# Altium PCB 2layer.PcbDoc (part 2 of 2)
Units mm, origin at the board's own origin, x right, y up, seen from the top; angles counter-clockwise.
Board outline 95.88 x 80.26 mm, 2 copper layers (Top Layer, Bottom Layer); 72 components, 60 nets, 280 pads, 229 vias.
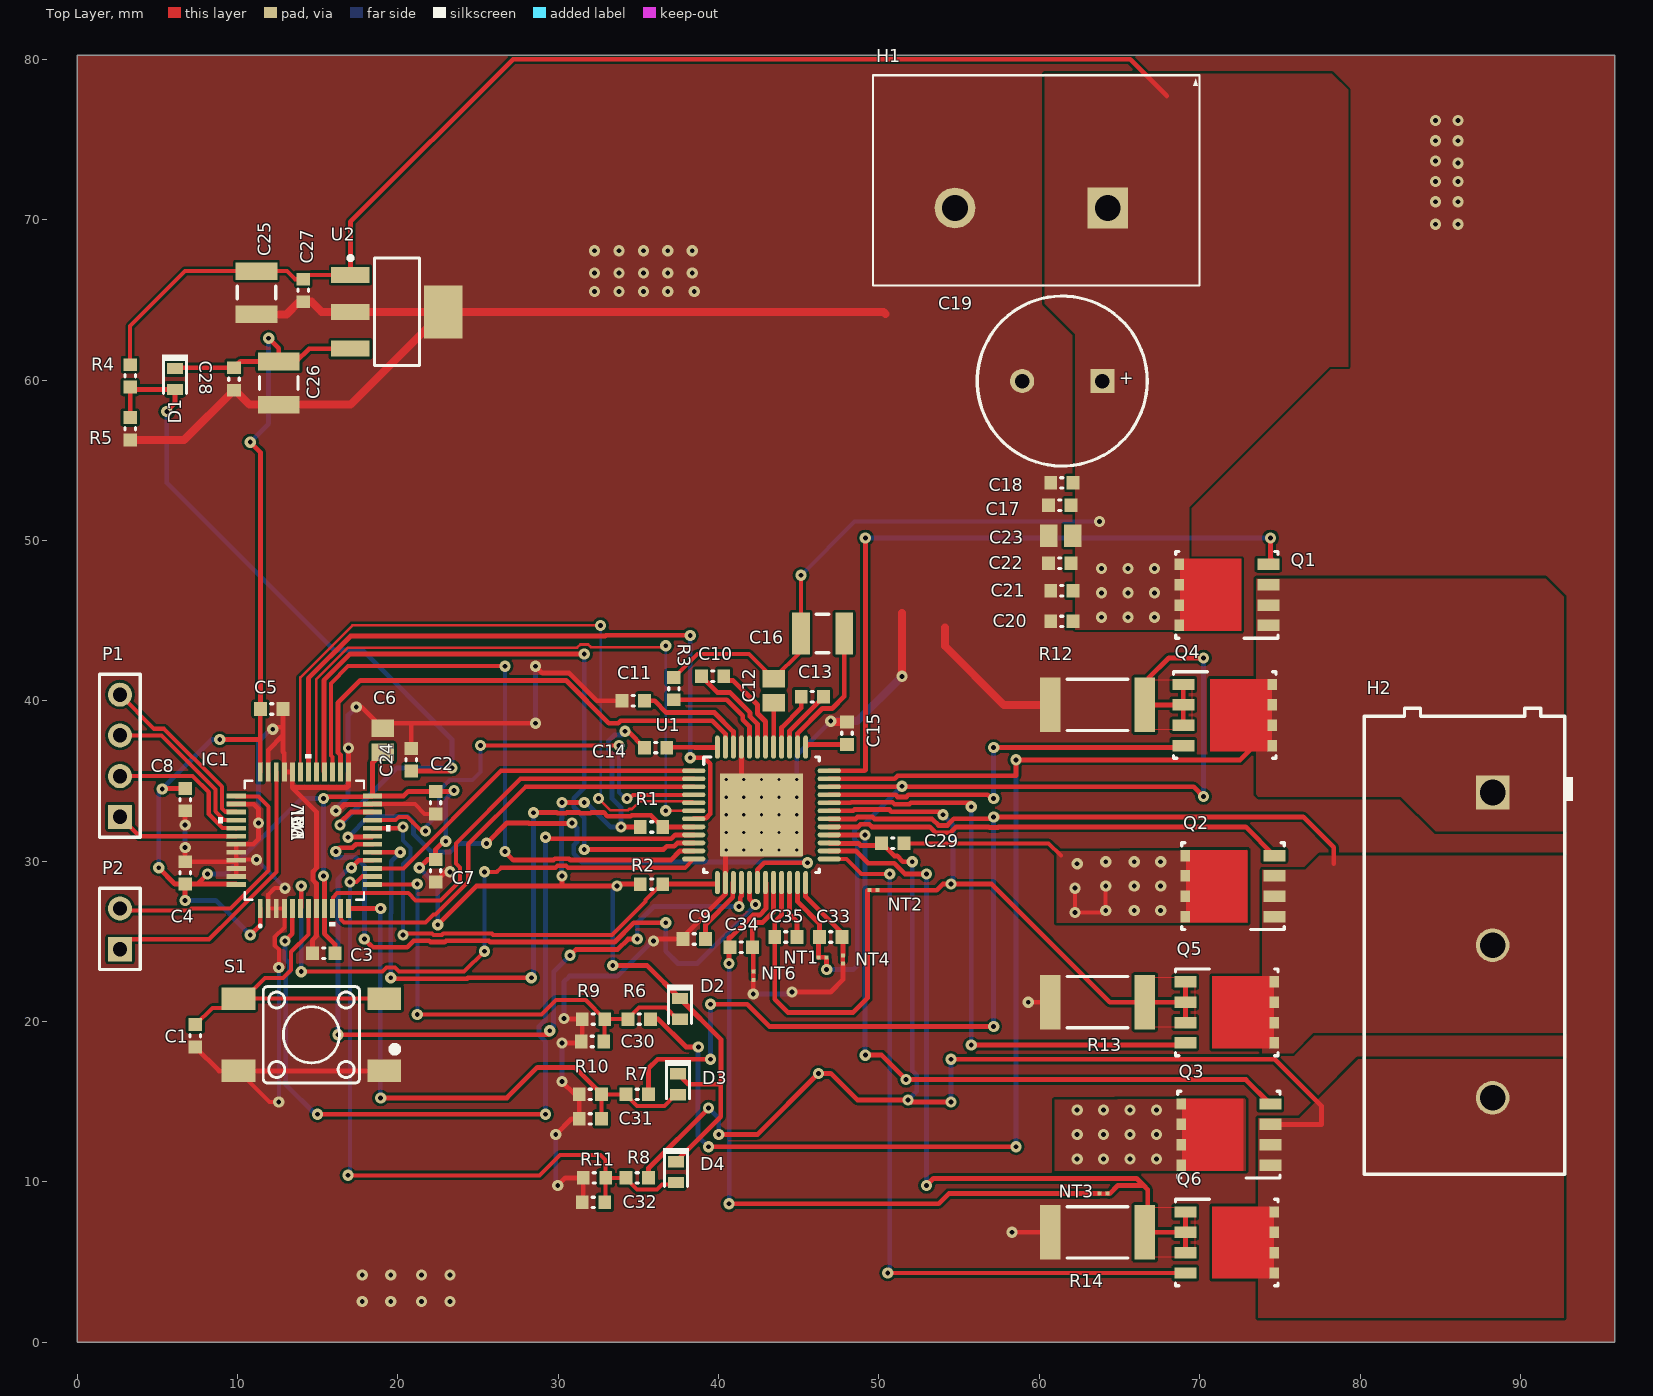
[diagram p0: Top Layer view]

## Via types
v1: diameter 0.7, hole 0.3, Top Layer to Bottom Layer, 204 vias
v2: diameter 0.5, hole 0.2, Top Layer to Bottom Layer, 25 vias

## Nets (pads, with @x,y where several pads share a name; then routed paths per layer and width w, separated by ;. In a path a pad name is that pad's centre, name@x,y a point inside that pad or via, vN(x,y) a via of type N, cw(c..) or ccw(c..) an arc to the next point about the centre after c; other vN are vias at no path point) (continued)
NRST: (continued)
  Top Layer w0.254: C1.1 7.391,19.812 8.433,20.854 9.482,20.854 S1.4 S1.4@10.405,21.427 ; IC1.7 14.415,25.437 13.333,24.355 13.333,23.227 12.837,22.731 11.709,22.731 S1.4@10.405,21.427 ; S1.3 S1.4@10.405,21.427
PVDD: C12.2 C16.2 C17.1 C18.1 C19.1 C20.1 C21.1 C22.1 C23.1 C25.1 C27.1 C29.1 H1.1 Q1.5 Q1.6 Q1.7 Q1.8 Q2.5 Q2.6 Q2.7 Q2.8 Q3.5 Q3.6 Q3.7 Q3.8 R3.2 R4.2 U2.1 | length 127
  Top Layer w0.254: R4.2 3.302,63.373 6.731,66.802 C25.1 13.081,66.802 13.589,66.294 C27.1 14.365,66.562 U2.1 ; R3.2 38.67,42.926 41.898,42.926 C12.2 45.132,43.088 C16.2 v1(45.132,47.832) ; C29.1 60.579,31.115 61.341,30.353 ; v1(62.23,28.321) v1(62.23,26.797) 64.008,26.797 v1(64.135,26.924) v1(64.135,28.448)
  Top Layer w0.3: U2.1 17.039,69.871 27.178,80.01 65.659,80.01 67.945,77.724
  Bottom Layer w0.254: v1(45.132,47.832) 48.481,51.181 v1(63.754,51.181)
  other v1: 62.357,11.43 64.008,11.43 65.659,11.43 67.31,11.43 62.357,12.954 64.008,12.954 65.659,12.954 67.31,12.954 62.357,14.478 64.008,14.478 65.659,14.478 67.31,14.478 65.913,26.924 67.564,26.924 65.913,28.448 67.564,28.448 62.357,29.845 64.135,29.972 65.913,29.972 67.564,29.972 63.881,45.212 65.532,45.212 67.183,45.212 63.881,46.736 65.532,46.736 67.183,46.736 63.881,48.26 65.532,48.26 67.183,48.26
SWCLK: IC1.37 P2.2 | length 16.6
  Top Layer w0.254: P2.2 2.796,26.922 6.995,26.922 7.124,27.051 9.563,27.051 11.522,29.01 ; IC1.37 9.94,34.033 11.306,34.033 11.94,33.399 11.94,32.121 11.938,32.119 11.938,29.426 11.522,29.01
SWDIO: IC1.34 P2.1 | length 18
  Top Layer w0.254: P2.1 3.29,25.134 8.231,25.134 9.734,26.637 11.936,28.838 ; 11.936,28.839 12.309,29.212 ; 12.31,29.212 12.415,29.317 IC1.34
VDD: C2.1 C3.1 C4.1 C5.1 C6.1 C7.1 C8.1 C14.1 C26.1 C28.1 D1.1 D2.1 D3.1 D4.1 IC1.1 IC1.9 IC1.24 IC1.36 IC1.48 R1.2 R2.2 U2.3 | length 167.9
  Top Layer w0.3: v1(5.08,29.591) 6.099,28.572 C4.1 ; v1(5.302,34.512) 5.334,34.544 C8.1 ; D1.1 6.146,60.771 C28.1 10.175,61.167 C26.1 ; v1(6.731,27.559) C4.1 ; v1(8.128,29.21) 7.49,28.572 ; v1(8.89,37.592) 11.415,37.592 ; IC1.48 9.901,28.572 7.49,28.572 ; v1(10.795,25.4) 11.415,26.02 IC1.1 ; v1(10.795,56.134) 11.427,55.502 C5.1 11.415,39.485 11.415,37.592 ; IC1.36 11.415,37.592 ; v1(11.938,62.611) 12.573,61.976 C26.1 ; v1(15.367,29.083) 15.415,29.035 IC1.9 15.415,25.479 16.067,24.827 C3.1 ; v1(15.367,33.909) 15.478,34.02 18.377,34.02 IC1.24 ; U2.3 14.464,61.962 13.669,61.167 C26.1 ; C6.1 18.415,36.154 IC1.24 ; v1(21.336,29.591) 21.844,30.099 C7.1 22.352,30.734 22.86,31.242 v1(22.987,31.242) ; v1(22.479,26.035) 24.892,28.448 30.226,28.448 ; v1(23.495,34.417) 23.433,34.355 C2.1 20.639,34.355 20.342,34.058 IC1.24 ; v1(30.226,29.083) 30.226,28.448 ; v1(30.226,33.655) v1(31.623,33.655) ; v1(33.401,23.495) 35.538,23.495 D2.1 40.157,18.876 40.157,16.117 40.132,16.092 ; v1(33.909,32.131) R1.2 ; v1(34.163,38.1) 34.352,38.1 C14.1 ; R2.2 33.782,28.575 v1(33.655,28.448) 30.226,28.448 ; D4.1 40.132,14.06 40.132,16.092 ; D3.1 38.115,16.092 40.132,16.092 ; C4.1 7.49,28.572
  Bottom Layer w0.3: v1(5.08,29.591) 5.08,34.29 v1(5.302,34.512) 8.382,37.592 v1(8.89,37.592) ; v1(6.731,27.559) 8.636,27.559 v1(10.795,25.4) ; v1(8.128,29.21) 9.271,29.21 13.97,33.909 v1(15.367,33.909) v1(15.367,29.083) ; v1(10.795,56.134) 11.938,57.277 v1(11.938,62.611) ; v1(21.336,29.591) 22.479,28.448 v1(22.479,26.035) ; v1(22.987,31.242) 22.987,33.909 v1(23.495,34.417) ; v1(30.226,29.083) 30.201,29.108 30.201,32.658 30.226,32.683 v1(30.226,33.655) ; v1(31.623,33.655) 31.75,33.655 33.274,32.131 v1(33.909,32.131) 33.909,33.357 33.345,33.921 33.345,36.715 33.122,36.938 33.122,37.484 33.509,37.871 33.934,37.871 v1(34.163,38.1) ; v1(33.401,23.495) 33.401,28.194 v1(33.655,28.448)
VSEN_PVDD: C24.1 D1.2 IC1.22 R4.1 R5.2 | length 50.6
  Top Layer w0.3: R5.2 R4.1 3.444,59.421 D1.2 6.096,58.547 v1(5.588,58.039) ; v1(16.383,32.258) 16.383,32.385 17.066,33.068 18.405,33.068 IC1.22 ; C24.1 23.303,35.622 23.368,35.687 v1(23.368,35.814)
  Bottom Layer w0.3: v1(5.588,58.039) 5.588,53.594 16.002,43.18 17.78,43.18 23.368,37.592 v1(23.368,35.814) 19.939,35.814 v1(16.383,32.258)

## Polygon pours and split planes (outlines as drawn)
GND on Top Layer "GND_Top" (solid, remove dead copper, pour order 50): 0,0 95.885,0 95.885,80.264 0,80.264
PVDD on Top Layer "Top Layer-No Net" (solid, remove dead copper, pour order 28): 72.988,30.708 72.887,30.607 72.988,30.708 72.988,26.162 61.087,26.162 61.087,30.607
PVDD on Top Layer "Top Layer-No Net" (solid, remove dead copper, pour order 38): 72.861,15.214 72.76,15.113 72.861,15.214 72.861,10.694 60.986,10.694 60.96,10.668 60.96,15.113
GND on Top Layer "Top Layer-No Net" (solid, remove dead copper, pour order 24): 58.801,63.817 60.706,61.912 60.706,51.625 60.579,51.498 60.579,48.578 60.579,44.005 49.784,44.005 49.784,45.148 49.784,78.803 58.801,78.803 58.801,78.676
PVDD on Top Layer "PVDD_Top" (solid, remove dead copper, pour order 22): 69.342,44.45 62.23,44.45 62.23,62.865 60.325,64.77 60.325,79.121 78.232,79.121 79.248,78.105 79.248,60.833 78.105,60.833 69.342,52.07
MOT_C on Top Layer "Top Layer-No Net" (solid, remove dead copper, pour order 20): 73.66,13.97 76.2,13.97 79.883,17.653 92.71,17.653 92.71,1.524 73.66,1.524
MOT_B on Top Layer "Top Layer-No Net" (solid, remove dead copper, pour order 18): 73.914,29.464 76.581,29.464 77.47,30.353 92.71,30.353 92.71,19.304 77.089,19.304 75.819,18.034 73.914,18.034
MOT_A on Top Layer "Top Layer-No Net" (solid, remove dead copper, pour order 16): 73.533,47.625 73.533,34.163 73.66,34.036 82.55,34.036 84.709,31.877 92.71,31.877 92.71,46.482 91.567,47.625
no net on Top Layer "Top Layer-No Net" (solid, remove dead copper, pour order 34): 69.723,8.382 66.548,8.382 66.548,5.334 69.723,5.334
no net on Top Layer "Top Layer-No Net" (solid, remove dead copper, pour order 30): 69.723,22.733 66.548,22.733 66.548,19.685 69.723,19.685
no net on Top Layer "Top Layer-No Net" (solid, remove dead copper, pour order 36): 69.532,41.275 66.358,41.275 66.358,38.227 69.532,38.227
GND on Bottom Layer "GND_Bot" (solid, remove dead copper, pour order 48): 0,80.264 0,0 95.885,0 95.885,80.264
no net on Bottom Layer "Top Layer-No Net" (solid, remove dead copper, pour order 40): 40.132,35.433 45.212,35.433 45.212,30.353 40.132,30.353
PVDD on Bottom Layer "PVDD_Bot" (solid, remove dead copper, pour order 26): 69.342,48.895 69.342,8.89 61.087,8.89 61.087,48.895

## Text inside footprints (layer, text, board x,y; h text height)
C19: Mechanical 5 "+" at 65.873,60.452 h0.8 r180; Top Overlay "+" at 65.873,60.452 h0.8 r180
IC1: Top Overlay "TOL" at 14.165,31.308 h0.8 r90; Top Overlay "VAL" at 14.165,31.308 h0.8 r90; Top Overlay "DEV" at 14.165,31.308 h0.8 r90; Top Overlay "PN" at 14.165,31.308 h0.8 r90